# Altium PCB Bender_main.PcbDoc (part 2 of 2)
Units mm, origin at the board's own origin, x right, y up, seen from the top; angles counter-clockwise.
Board outline 153 x 119 mm, 2 copper layers (Top Layer, Bottom Layer); 318 components, 305 nets, 1119 pads, 323 vias.
Unrouted connection lines stored in the file: 2.
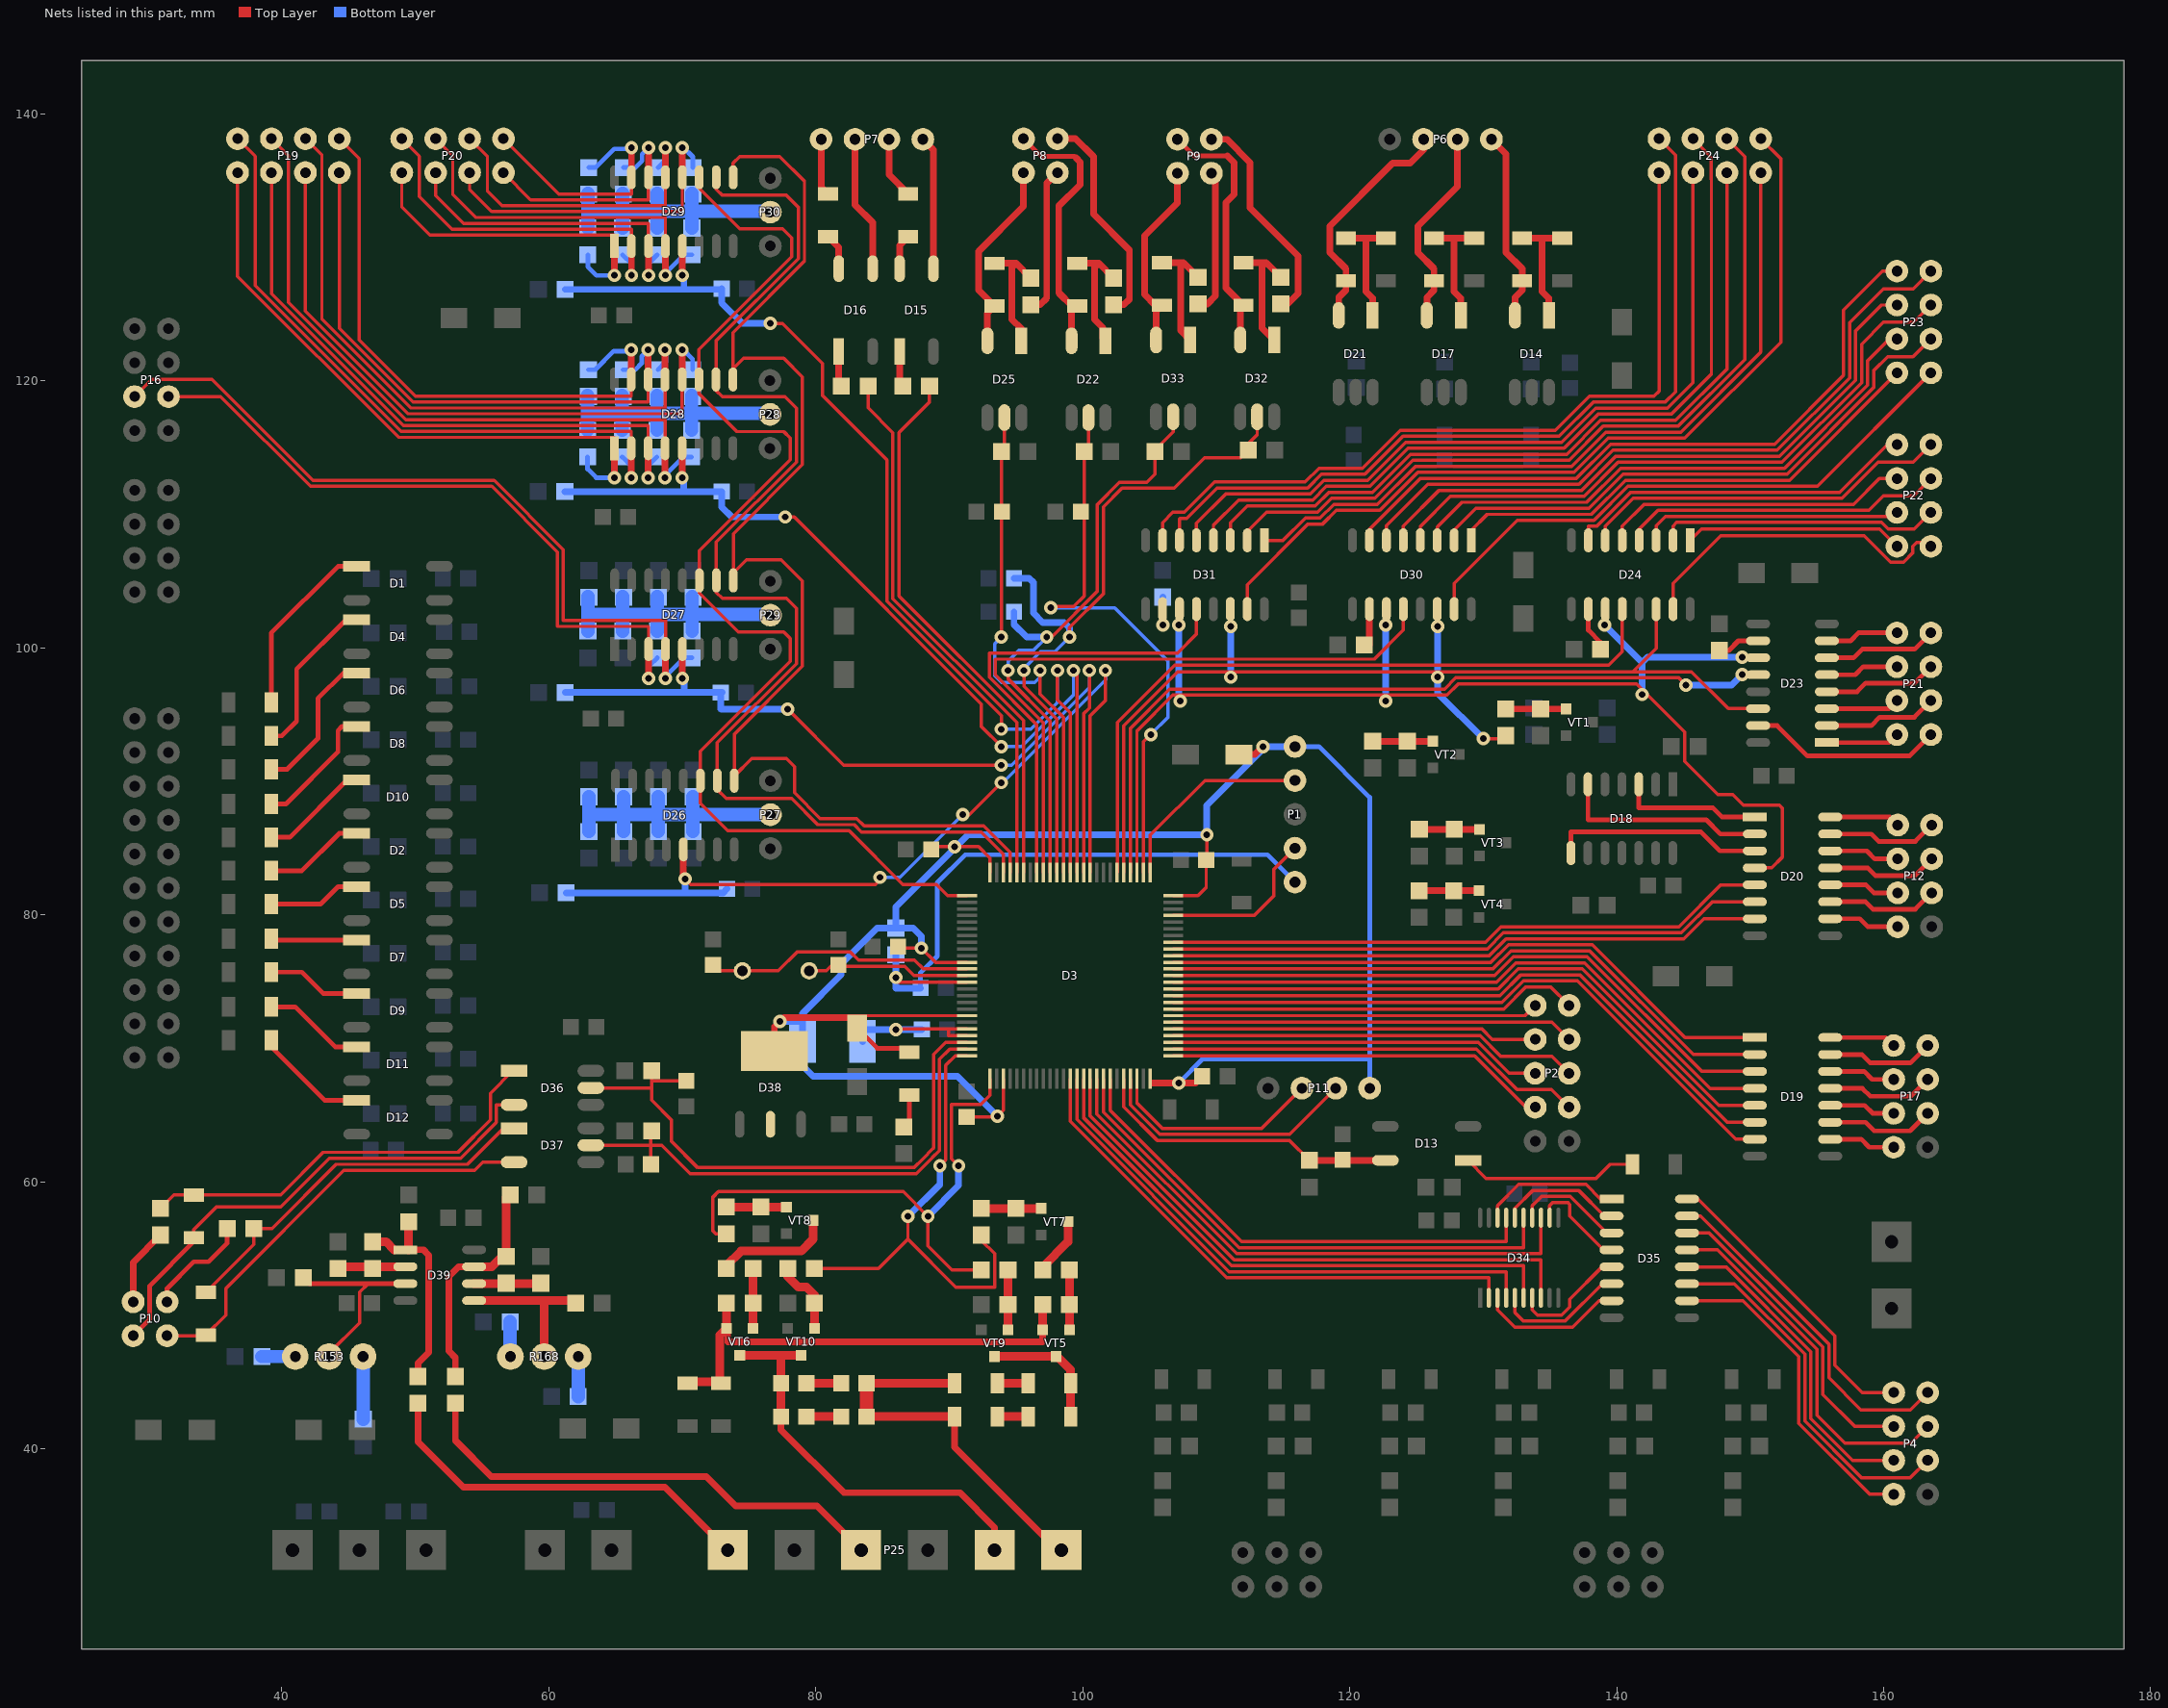
[diagram p2: the nets of this part, all layers, seen from the top]

## Via types
v1: diameter 1, hole 0.5, Top Layer to Bottom Layer, 323 vias

## Nets (pads, with @x,y where several pads share a name; then routed paths per layer and width w, separated by ;. In a path a pad name is that pad's centre, name@x,y a point inside that pad or via, vN(x,y) a via of type N, cw(c..) or ccw(c..) an arc to the next point about the centre after c; other vN are vias at no path point) (continued)
M_IN_15: D27.3 P16.6 R103.1 | length 52.1
  Top Layer w0.24: P16.6@31.5,118.82 35.425,118.82 42.145,112.1 55.723,112.1 60.645,107.178 60.645,101.6 67.47,101.6 D27.3@67.47,99.9
  Top Layer w0.5: v1(67.47,97.7) D27.3@67.47,99.9
  Bottom Layer w0.35: v1@67.53,97.7 67.53,98.65 R103.1@68.13,99.25
M_IN_16: D27.4 P16.5 R104.1 | length 57.9
  Top Layer w0.24: P16.5@28.96,118.82 30.24,120.1 34.767,120.1 42.327,112.54 55.905,112.54 61.085,107.36 61.085,102.04 68.74,102.04 D27.4@68.74,99.9
  Top Layer w0.5: v1(68.74,97.7) D27.4@68.74,99.9
  Bottom Layer w0.35: v1@68.83,97.7 68.83,97.95 70.13,99.25 R104.1@70.73,99.25
M_IN_17: D28.15 P19.1 R105.1 | length 45
  Top Layer w0.24: P19.1@44.3,138.14 45.8,136.64 45.8,123.056 50.006,118.85 66.17,118.85 D28.15@66.17,120.1
  Top Layer w0.5: D28.15@66.17,120.1 v1(66.17,122.33)
  Bottom Layer w0.35: R105.1@62.97,120.83 63.47,120.83 64.87,122.23 v1@66.07,122.23
M_IN_18: D28.14 P19.2 R106.1 | length 43.8
  Top Layer w0.24: P19.2@44.3,135.6 44.3,123.934 49.824,118.41 67.44,118.41 D28.14@67.44,120.1
  Top Layer w0.5: D28.14@67.44,120.1 v1(67.44,122.33)
  Bottom Layer w0.35: R106.1@65.57,120.83 66.47,120.83 66.97,121.33 66.97,121.83 v1@67.47,122.33
M_IN_19: D28.13 P19.3 R107.1 | length 48.6
  Top Layer w0.24: P19.3@41.76,138.14 43,136.9 43,124.611 49.641,117.97 68.71,117.97 D28.13@68.71,120.1
  Top Layer w0.5: D28.13@68.71,120.1 v1(68.71,122.33)
  Bottom Layer w0.35: R107.1@68.17,120.83 68.77,121.43 v1@68.77,122.33
M_IN_20: D28.12 P19.4 R127.1 | length 48.4
  Top Layer w0.24: P19.4@41.76,135.6 41.76,125.229 49.459,117.53 69.98,117.53 D28.12@69.98,120.1
  Top Layer w0.5: D28.12@69.98,120.1 v1(69.98,122.33)
  Bottom Layer w0.35: v1@70.07,122.33 70.77,121.63 R127.1@70.77,120.83
M_IN_21: D28.1 P19.8 R128.1 | length 47.2
  Top Layer w0.24: P19.8@36.68,135.6 36.68,127.82 48.73,115.77 64.9,115.77 D28.1@64.9,114.95
  Top Layer w0.5: v1(64.9,112.75) D28.1@64.9,114.95
  Bottom Layer w0.35: R128.1@62.9,114.3 62.9,113.4 63.55,112.75 v1(64.9,112.75)
M_IN_22: D28.2 P19.7 R129.1 | length 49.6
  Top Layer w0.24: P19.7@36.68,138.14 38,136.82 38,127.122 48.912,116.21 66.17,116.21 D28.2@66.17,114.95
  Top Layer w0.5: v1(66.17,112.75) D28.2@66.17,114.95
  Bottom Layer w0.35: R129.1@65.5,114.3 66.2,113.6 v1@66.2,112.75
M_IN_23: D28.3 P19.6 R130.1 | length 47.1
  Top Layer w0.24: P19.6@39.22,135.6 39.22,126.525 49.095,116.65 67.44,116.65 D28.3@67.44,114.95
  Top Layer w0.5: v1(67.44,112.75) D28.3@67.44,114.95
  Bottom Layer w0.35: v1@67.5,112.75 67.5,113.7 R130.1@68.1,114.3
M_IN_24: D28.4 P19.5 R131.1 | length 51.7
  Top Layer w0.24: P19.5@39.22,138.14 40.5,136.86 40.5,125.867 49.277,117.09 68.71,117.09 D28.4@68.71,114.95
  Top Layer w0.5: v1(68.71,112.75) D28.4@68.71,114.95
  Bottom Layer w0.35: v1@68.8,112.75 68.8,113 70.1,114.3 R131.1@70.7,114.3
M_IN_25: D29.15 P20.1 R132.1 | length 18.5
  Top Layer w0.24: P20.1@56.6,138.14 60.74,134 66.19,134 D29.15@66.19,135.25
  Top Layer w0.5: D29.15@66.19,135.25 v1(66.19,137.48)
  Bottom Layer w0.35: R132.1@62.99,135.98 63.49,135.98 64.89,137.38 v1@66.09,137.38
M_IN_26: D29.14 P20.2 R133.1 | length 18.4
  Top Layer w0.24: P20.2@56.6,135.6 58.64,133.56 67.46,133.56 D29.14@67.46,135.25
  Top Layer w0.5: D29.14@67.46,135.25 v1(67.46,137.48)
  Bottom Layer w0.35: R133.1@65.59,135.98 66.49,135.98 66.99,136.48 66.99,136.98 v1@67.49,137.48
M_IN_27: D29.13 P20.3 R134.1 | length 24.4
  Top Layer w0.24: P20.3@54.06,138.14 55.4,136.8 55.4,134.2 56.48,133.12 68.73,133.12 D29.13@68.73,135.25
  Top Layer w0.5: D29.13@68.73,135.25 v1(68.73,137.48)
  Bottom Layer w0.35: R134.1@68.19,135.98 68.79,136.58 v1@68.79,137.48
M_IN_28: D29.12 P20.4 R135.1 | length 24.5
  Top Layer w0.24: P20.4@54.06,135.6 54.06,134.34 55.72,132.68 70,132.68 D29.12@70,135.25
  Top Layer w0.5: D29.12@70,135.25 v1(70,137.48)
  Bottom Layer w0.35: v1@70.09,137.48 70.79,136.78 R135.1@70.79,135.98
M_IN_29: D29.1 P20.8 R136.1 | length 25.6
  Top Layer w0.24: P20.8@48.98,135.6 48.98,133.02 51.08,130.92 64.92,130.92 D29.1@64.92,130.1
  Top Layer w0.5: v1(64.92,127.9) D29.1@64.92,130.1
  Bottom Layer w0.35: R136.1@62.92,129.45 62.92,128.55 63.57,127.9 v1(64.92,127.9)
M_IN_30: D29.2 P20.7 R137.1 | length 27.1
  Top Layer w0.24: P20.7@48.98,138.14 50.3,136.82 50.3,133.8 52.74,131.36 66.19,131.36 D29.2@66.19,130.1
  Top Layer w0.5: v1(66.19,127.9) D29.2@66.19,130.1
  Bottom Layer w0.35: R137.1@65.52,129.45 66.22,128.75 v1@66.22,127.9
M_IN_31: D29.3 P20.6 R138.1 | length 24.2
  Top Layer w0.24: P20.6@51.52,135.6 51.52,133.88 53.6,131.8 67.46,131.8 D29.3@67.46,130.1
  Top Layer w0.5: v1(67.46,127.9) D29.3@67.46,130.1
  Bottom Layer w0.35: v1@67.52,127.9 67.52,128.85 R138.1@68.12,129.45
M_IN_32: D29.4 P20.5 R139.1 | length 28.4
  Top Layer w0.24: P20.5@51.52,138.14 52.8,136.86 52.8,134 54.56,132.24 68.73,132.24 D29.4@68.73,130.1
  Top Layer w0.5: v1(68.73,127.9) D29.4@68.73,130.1
  Bottom Layer w0.35: v1@68.82,127.9 68.82,128.15 70.12,129.45 R139.1@70.72,129.45
M_S0: D3.1 D26.11 D27.11 D28.11 D29.11 | length 92.7
  Top Layer w0.25: D29.11@71.27,135.25 71.27,134.43 74.3,131.4 77.5,131.4 78.2,130.7 78.2,129.3 71.25,122.35 D28.11@71.25,120.1 71.25,119.05 74.1,116.2 77.6,116.2 78.1,115.7 78.1,114.1 71.28,107.28 D27.11@71.28,105.05 71.28,104.12 74.2,101.2 77.6,101.2 78.1,100.7 78.1,99 71.35,92.25 D26.11@71.35,90.04 71.35,88.35 73.4,86.3 82.5,86.3 86.532,82.268 89.032,82.268 89.862,81.438 D3.1@91.335,81.438
M_S1: D3.98 D26.10 D27.10 D28.10 D29.10 | length 93.2
  Top Layer w0.25: D29.10@72.54,134.36 73,133.9 77.8,133.9 78.7,133 78.7,129.164 72.52,122.984 D28.10@72.52,120.1 72.52,119.28 73,118.8 77.7,118.8 78.55,117.95 78.55,113.914 72.55,107.914 D27.10@72.55,105.05 72.55,104.15 73,103.7 77.8,103.7 78.55,102.95 78.55,98.814 72.62,92.884 D26.10@72.62,90.04 72.62,89.38 73.3,88.7 78.2,88.7 80.15,86.75 82.886,86.75 83.436,86.2 92.4,86.2 94.06,84.54 D3.98@94.06,83.163
M_S2: D3.97 D26.9 D27.9 D28.9 D29.9 | length 97.3
  Top Layer w0.25: D29.9@73.81,135.25 73.81,136.31 74.3,136.8 77.3,136.8 79.15,134.95 79.15,128.977 73.79,123.617 73.79,120.89 74.6,121.7 77.6,121.7 79,120.3 79,113.727 73.82,108.547 D27.9@73.82,105.62 ; D27.9@73.82,105.05 D27.9@73.82,105.62 ; D26.9@73.89,90.04 D26.9@73.89,90.39 ; D3.97@94.56,83.163 94.56,84.676 92.586,86.65 83.623,86.65 83.073,87.2 80.336,87.2 78.4,89.136 78.4,91.1 77.8,91.7 75.2,91.7 D26.9@73.89,90.39 ; D27.9@73.82,105.62 74.8,106.6 77.4,106.6 79,105 79,98.627 73.89,93.517 D26.9@73.89,90.39
M_Y1: C17.1 D3.85 D26.5 R70.1 | length 69.8
  Top Layer w0.25: v1(70.2,82.69) 70.622,82.268 84.468,82.268 v1@84.8,82.6 ; v1(91,87.5) 91.5,87.5 v1(93.9,89.9) ; D3.85@100.56,83.163 100.56,94.906 101.7,96.046 v1(101.7,98.3)
  Top Layer w0.5: D26.5@70.08,84.89 70.08,82.81 v1(70.2,82.69)
  Bottom Layer w0.25: v1(84.8,82.8) 86.3,82.8 v1(91,87.5) ; v1(93.9,89.9) 94.009,89.9 101.736,97.627 101.736,98.264 v1(101.7,98.3)
  Bottom Layer w0.5: R70.1@61.3,81.64 73.05,81.64 C17.1@73.35,81.94 ; 70.2,81.64 v1(70.2,82.69)
M_Y2: C18.1 D3.86 D27.5 R71.1 | length 64.6
  Top Layer w0.25: v1(77.9,95.4) 82.1,91.2 v1(93.9,91.2) ; D3.86@100.06,83.163 100.06,95.06 100.5,95.5 v1(100.5,98.3)
  Top Layer w0.5: v1(70.01,97.7) D27.5@70.01,99.9
  Bottom Layer w0.25: v1(93.9,91.2) 94.673,91.2 100.5,97.027 v1(100.5,98.3)
  Bottom Layer w0.5: R71.1@61.23,96.65 C18.1@72.98,96.65 ; 70.13,96.65 v1@70.13,97.7 ; C18.1@72.88,96.65 72.88,95.42 72.9,95.4 v1(77.9,95.4)
M_Y3: C19.1 D3.87 D28.5 R72.1 | length 69.6
  Top Layer w0.25: v1(77.7,109.8) 78.391,109.8 92.4,95.791 92.4,94.1 v1(93.9,92.6) ; v1(99.3,98.3) 99.56,98.04 D3.87@99.56,83.163
  Top Layer w0.5: v1(69.98,112.75) D28.5@69.98,114.95
  Bottom Layer w0.25: v1(93.9,92.6) 95.436,92.6 99.3,96.464 v1(99.3,98.3)
  Bottom Layer w0.5: R72.1@61.2,111.7 C19.1@72.95,111.7 72.95,110.55 73,110.5 73.7,109.8 v1(77.7,109.8) ; 70.1,111.7 v1@70.1,112.75
M_Y4: C20.1 D3.88 D29.5 R73.1 | length 81.4
  Top Layer w0.25: v1(76.6,124.3) 77.5,124.3 80.5,121.3 80.5,118.9 85.328,114.072 85.328,103.499 93.9,94.927 v1(93.9,93.9) ; v1(98.1,98.3) 98.1,96.1 99.06,95.14 D3.88@99.06,83.163
  Top Layer w0.5: v1(70,127.9) D29.5@70,130.1
  Bottom Layer w0.25: v1(93.9,93.9) 96.1,93.9 98.1,95.9 v1(98.1,98.3)
  Bottom Layer w0.5: R73.1@61.22,126.85 C20.1@72.95,126.85 ; 70.12,126.85 v1@70.12,127.9 ; C20.1@72.95,126.9 C20.1@72.95,126.85 ; v1(76.6,124.3) 74.5,124.3 73,125.8 72.95,125.85 C20.1@72.95,126.85
NetC1_1: C1.1 D3.21 D3.22 L1.2 | length 12.6
  Top Layer w0.25: v1(86,71.4) 86.038,71.438 89.9,71.438 ; D3.22@91.335,70.938 89.962,70.938 89.962,71.376 89.9,71.438 ; D3.21@91.335,71.438 89.9,71.438
  Bottom Layer w0.5: L1.2@83.5,70.5 83.5,71.4 v1(86,71.4) C1.1@87.95,71.4
NetC13_1: C13.1 C14.2 | length 2.6
  Top Layer w0.65: C14.2@79.3,44.9 C13.1@81.9,44.9
NetC15_1: C15.1 C16.2 | length 2.6
  Top Layer w0.65: C16.2@79.3,42.4 C15.1@81.9,42.4
NetD1_1: D1.1 R1.2 | length 13.7
  Top Layer w0.35: R1.2@39.2,95.9 39.2,101.1 44.2,106.1 D1.1@45.6,106.1
NetD2_1: D2.1 R2.2 | length 7.6
  Top Layer w0.35: R2.2@39.2,83.3 41.5,83.3 44.3,86.1 D2.1@45.6,86.1
NetD4_1: D4.1 R4.2 | length 12.3
  Top Layer w0.35: R4.2@39.2,93.4 40,93.4 41.1,94.5 41.1,98.4 44.8,102.1 D4.1@45.6,102.1
NetD5_1: D5.1 R5.2 | length 6.9
  Top Layer w0.35: R5.2@39.2,80.8 42.9,80.8 44.2,82.1 D5.1@45.6,82.1
NetD6_1: D6.1 R7.2 | length 11.1
  Top Layer w0.35: R7.2@39.2,90.9 40.4,90.9 42.7,93.2 42.7,96.2 44.6,98.1 D6.1@45.6,98.1
NetD7_1: D7.1 R8.2 | length 6.4
  Top Layer w0.35: R8.2@39.2,78.2 39.3,78.1 D7.1@45.6,78.1
NetD8_1: D8.1 R9.2 | length 9.7
  Top Layer w0.35: R9.2@39.2,88.3 40.3,88.3 44.2,92.2 44.2,93.8 44.5,94.1 D8.1@45.6,94.1
NetD9_1: D9.1 R10.2 | length 7.1
  Top Layer w0.35: R10.2@39.2,75.7 41.5,75.7 43.1,74.1 D9.1@45.6,74.1
NetD10_1: D10.1 R13.2 | length 8.2
  Top Layer w0.35: R13.2@39.2,85.8 40.6,85.8 44.9,90.1 D10.1@45.6,90.1
NetD11_1: D11.1 R14.2 | length 7.6
  Top Layer w0.35: R14.2@39.2,73.1 41,73.1 44,70.1 D11.1@45.6,70.1
NetD12_1: D12.1 R17.2 | length 8.6
  Top Layer w0.35: R17.2@39.2,70.6 39.2,70.1 43.2,66.1 D12.1@45.6,66.1
NetD13_1: D13.1 R18.2 | length 13.3
  Top Layer w0.25: D13.1@128.875,61.6 130.225,60.25 138.45,60.25 139.5,61.3 R18.2@141.2,61.3
NetD14_1: D14.1 R19.2 VD1.2 | length 9
  Top Layer w0.5: VD1.2@132.92,130.7 134.42,130.7 ; D14.1@134.92,124.9 134.92,126.2 134.42,126.7 134.42,130.7 ; R19.2@135.92,130.7 134.42,130.7
NetD15_1: D15.1 R21.1 | length 2.7
  Top Layer w0.5: D15.1@86.275,122.201 86.275,119.845 R21.1@86.52,119.6
NetD15_4: D15.4 R20.2 | length 2.7
  Top Layer w0.5: D15.4@86.275,128.401 86.275,130.155 R20.2@86.92,130.8
NetD16_1: D16.1 R27.1 | length 2.7
  Top Layer w0.5: D16.1@81.72,122.2 81.72,119.8 R27.1@81.92,119.6
NetD16_4: D16.4 R26.2 | length 2.7
  Top Layer w0.5: R26.2@80.92,130.8 81.72,130 D16.4@81.72,128.4
NetD17_1: D17.1 R28.2 VD2.2 | length 9
  Top Layer w0.5: VD2.2@126.32,130.7 127.82,130.7 ; D17.1@128.32,124.9 128.32,126.2 127.82,126.7 127.82,130.7 ; R28.2@129.32,130.7 127.82,130.7
NetD21_1: D21.1 R29.2 VD3.2 | length 9
  Top Layer w0.5: VD3.2@119.72,130.7 121.22,130.7 ; D21.1@121.72,124.9 121.72,126.2 121.22,126.7 121.22,130.7 ; R29.2@122.72,130.7 121.22,130.7
NetD22_1: D22.1 R30.2 VD4.2 | length 9.4
  Top Layer w0.5: VD4.2@99.6,128.8 101.2,128.8 ; D22.1@101.7,123 101.5,123.2 101.5,124 100.9,124.6 100.9,128.5 101.2,128.8 ; R30.2@102.3,127.7 101.2,128.8
NetD23_10: D23.10 R31.1 | length 3.2
  Top Layer w0.35: R31.1@147.7,99.8 148.4,99.8 149.12,100.52 D23.10@150.6,100.52
NetD24_10: D24.10 R32.1 | length 3.4
  Top Layer w0.35: D24.10@137.88,102.9 137.88,101.32 138.8,100.4 R32.1@138.8,99.9
NetD25_1: D25.1 R33.2 VD5.2 | length 9.4
  Top Layer w0.5: VD5.2@93.4,128.8 95,128.8 ; D25.1@95.4,123 95.4,123.9 94.7,124.6 94.7,128.5 95,128.8 ; R33.2@96.1,127.7 95,128.8
NetD30_10: D30.10 R34.1 | length 3.1
  Top Layer w0.5: R34.1@121.1,100.2 121.48,100.2 D30.10@121.48,102.9
NetD31_10: D31.10 R35.1 | length 2.1
  Bottom Layer w0.5: v1(106,101.7) R35.1@106,103.8
NetD32_1: D32.1 R36.2 VD6.2 | length 9.6
  Top Layer w0.5: VD6.2@112.04,128.86 113.74,128.86 ; D32.1@114.34,123.06 113.44,123.96 113.44,128.56 113.74,128.86 ; R36.2@114.84,127.76 113.74,128.86
NetD33_1: D33.1 R37.2 VD7.2 | length 9.3
  Top Layer w0.5: VD7.2@105.94,128.86 107.54,128.86 ; D33.1@108.04,123.06 107.34,123.76 107.34,128.66 107.54,128.86 ; R37.2@108.64,127.76 107.54,128.86
NetD34_3: D34.3 D35.7 | length 10.8
  Top Layer w0.25: D34.3@131.075,51.3 131.075,50.4 132.375,49.1 136.7,49.1 138.68,51.08 D35.7@139.625,51.08
NetD34_5: D34.5 D35.6 | length 9.8
  Top Layer w0.25: D34.5@132.375,51.3 132.375,50.2 133.025,49.55 136.125,49.55 138.925,52.35 D35.6@139.625,52.35
NetD34_7: D34.7 D35.5 | length 8.9
  Top Layer w0.25: D34.7@133.675,51.3 133.675,50.4 134.075,50 135.875,50 136.475,50.6 136.475,51.175 138.92,53.62 D35.5@139.625,53.62
NetD34_12: D34.12 D35.4 | length 7.6
  Top Layer w0.25: D34.12@134.975,57.3 134.975,58.2 135.225,58.45 136.325,58.45 136.475,58.3 136.475,57.425 139.01,54.89 D35.4@139.625,54.89
NetD34_14: D34.14 D35.3 | length 8.3
  Top Layer w0.25: D34.14@133.675,57.3 133.675,58.2 134.375,58.9 136.511,58.9 139.251,56.16 D35.3@139.625,56.16
NetD34_16: D34.16 D35.2 | length 9.3
  Top Layer w0.25: D34.16@132.375,57.3 132.375,58 133.725,59.35 137.15,59.35 139.07,57.43 D35.2@139.625,57.43
NetD34_18: D34.18 D35.1 | length 10.6
  Top Layer w0.25: D34.18@131.075,57.3 131.075,58.2 132.675,59.8 137.7,59.8 138.8,58.7 D35.1@139.625,58.7
NetD36_1: D36.1 R44.2 VD11.2 | length 31.9
  Top Layer w0.25: R44.2@30.9,58 31.9,59 VD11.2@33.4,59 39.9,59 43.1,62.2 53.2,62.2 55.625,64.625 55.625,66.625 57.3,68.3 D36.1@57.4,68.3
NetD37_1: D37.1 R51.2 VD15.2 | length 28.9
  Top Layer w0.25: VD15.2@34.3,51.7 37.9,55.3 R51.2@37.9,56.5 39.264,56.5 44.064,61.3 53.9,61.3 56.6,64 D37.1@57.4,64
NetD39_1: D39.1 R157.1 R159.2 R162.2 | length 16.1
  Top Layer w0.35: D39.1@48.4,54.9 D39.1@49.25,54.9
  Top Layer w0.5: D39.1@49.25,54.9 49.5,54.9 50.6,54.9 51,54.5 51,47.2 50.2,46.4 R159.2@50.2,45.4
  Top Layer w0.65: R157.1@46.8,55.5 47.8,55.5 D39.1@48.4,54.9 ; D39.1@49.5,54.9 R162.2@49.5,57
NetD39_2: D39.2 R157.2 R158.1 | length 5.1
  Top Layer w0.35: R158.1@44.2,53.5 R158.1@44.33,53.63
  Top Layer w0.65: R158.1@44.33,53.63 D39.2@49.25,53.63
NetD39_3: D39.3 R153.3 R156.1 | length 14.5
  Top Layer w0.25: R153.3@43.54,46.9 43.54,47.14 45.825,49.425 45.825,51.725 46.46,52.36
  Top Layer w0.35: R156.1@41.6,52.8 42.04,52.36 46.46,52.36 ; 46.475,52.36 D39.3@49.25,52.36
NetD39_5: D39.5 R164.1 R168.3 | length 11.9
  Top Layer w0.35: R164.1@61.81,51.09 R164.1@62,50.9
  Top Layer w0.65: D39.5@54.4,51.09 59.64,51.09 ; R168.3@59.64,46.9 59.64,51.09 ; R164.1@61.81,51.09 59.64,51.09
NetD39_6: D39.6 R160.1 R165.2 | length 5
  Top Layer w0.35: R160.1@59.36,52.36 R160.1@59.4,52.4
  Top Layer w0.65: D39.6@54.4,52.36 R160.1@59.36,52.36
NetD39_7: D39.7 R161.2 R163.2 R165.1 | length 17.3
  Top Layer w0.35: R165.1@56.5,54.4 R165.1@56.8,54.4 ; R163.2@56.8,58.8 R163.2@57,59
  Top Layer w0.5: R161.2@53,45.4 53,46.8 52.5,47.3 52.5,52.9 53.23,53.63 D39.7@54.4,53.63
  Top Layer w0.65: D39.7@54.4,53.63 55.73,53.63 R165.1@56.5,54.4 ; R165.1@56.8,54.4 R163.2@56.8,58.8
NetP27_2: P27.2 R89.2 R90.2 R91.2 R92.2 R93.2 R94.2 R95.2 R96.2 | length 24
  Bottom Layer w1: R93.2@63,86.24 63,87.5 ; R89.2@63,88.84 63,87.5 ; R94.2@65.6,86.24 65.6,87.5 ; R90.2@65.6,88.84 65.6,87.5 ; R95.2@68.2,86.24 68.2,87.5 ; R91.2@68.2,88.84 68.2,87.5 ; R96.2@70.8,86.24 70.8,87.5 ; R92.2@70.8,88.84 70.8,87.5 ; P27.2@76.6,87.5 70.8,87.5 ; 63,87.5 65.6,87.5 ; 65.6,87.5 68.2,87.5 ; 68.2,87.5 70.8,87.5
NetP28_2: P28.2 R105.2 R106.2 R107.2 R127.2 R128.2 R129.2 R130.2 R131.2 | length 24
  Bottom Layer w1: R128.2@62.9,116.3 62.9,117.56 ; R105.2@62.9,118.9 62.9,117.56 ; R129.2@65.5,116.3 65.5,117.56 ; R106.2@65.5,118.9 65.5,117.56 ; R130.2@68.1,116.3 68.1,117.56 ; R107.2@68.1,118.9 68.1,117.56 ; R131.2@70.7,116.3 70.7,117.56 ; R127.2@70.7,118.9 70.7,117.56 ; P28.2@76.5,117.56 70.7,117.56 ; 62.9,117.56 65.5,117.56 ; 65.5,117.56 68.1,117.56 ; 68.1,117.56 70.7,117.56
NetP29_2: P29.2 R97.2 R98.2 R99.2 R100.2 R101.2 R102.2 R103.2 R104.2 | length 24
  Bottom Layer w1: R101.2@62.93,101.25 62.93,102.51 ; R97.2@62.93,103.85 62.93,102.51 ; R102.2@65.53,101.25 65.53,102.51 ; R98.2@65.53,103.85 65.53,102.51 ; R103.2@68.13,101.25 68.13,102.51 ; R99.2@68.13,103.85 68.13,102.51 ; R104.2@70.73,101.25 70.73,102.51 ; R100.2@70.73,103.85 70.73,102.51 ; P29.2@76.53,102.51 70.73,102.51 ; 62.93,102.51 65.53,102.51 ; 65.53,102.51 68.13,102.51 ; 68.13,102.51 70.73,102.51
NetP30_2: P30.2 R132.2 R133.2 R134.2 R135.2 R136.2 R137.2 R138.2 R139.2 | length 24
  Bottom Layer w1: R136.2@62.92,131.45 62.92,132.71 ; R132.2@62.92,134.05 62.92,132.71 ; R137.2@65.52,131.45 65.52,132.71 ; R133.2@65.52,134.05 65.52,132.71 ; R138.2@68.12,131.45 68.12,132.71 ; R134.2@68.12,134.05 68.12,132.71 ; R139.2@70.72,131.45 70.72,132.71 ; R135.2@70.72,134.05 70.72,132.71 ; P30.2@76.52,132.71 70.72,132.71 ; 62.92,132.71 65.52,132.71 ; 65.52,132.71 68.12,132.71 ; 68.12,132.71 70.72,132.71
NetR6_2: R6.2 VL1.2 | length 2.6
  Top Layer w0.35: R6.2@86.6,64.1 87,64.5 VL1.2@87,66.5
NetR11_2: R11.2 R15.2 VT1.1 | length 4.5
  Top Layer w0.5: R11.2@131.7,95.42 R15.2@134.3,95.42 VT1.1@136.2,95.42
NetR12_2: R12.2 R16.2 VT2.1 | length 4.5
  Top Layer w0.5: R12.2@121.72,93 R16.2@124.32,93 VT2.1@126.22,93
NetR22_2: R22.2 R24.2 VT3.1 | length 4.5
  Top Layer w0.5: R22.2@125.22,86.4 R24.2@127.82,86.4 VT3.1@129.72,86.4
NetR23_2: R23.2 R25.2 VT4.1 | length 4.5
  Top Layer w0.5: R23.2@125.2,81.8 VT4.1@129.7,81.8
NetR52_1: R52.1 R53.1 R54.2 R55.2 VT5.2 VT6.2 | length 36
  Top Layer w0.5: VT6.2@73.3,49 73.4,48.9 73.4,48 97,48 VT5.2@97,48.9
  Top Layer w0.65: R53.1@70.3,45 72.8,45 72.8,48.5 VT6.2@73.3,49 R55.2@73.3,50.9 ; VT5.2@97,48.9 R54.2@97,50.8
NetR54_1: R54.1 R56.1 VT5.1 | length 4.5
  Top Layer w0.65: VT5.1@99,48.9 R54.1@99,50.8 R56.1@99,53.4
NetR55_1: R55.1 R57.2 VT6.1 | length 4.5
  Top Layer w0.65: VT6.1@75.3,49 R55.1@75.3,50.9 R57.2@75.3,53.5
NetR56_2: R56.2 VT7.3 | length 4.2
  Top Layer w0.65: R56.2@97,53.6 98.9,55.5 VT7.3@98.9,57
NetR57_1: R57.1 VT8.3 | length 8.9
  Top Layer w0.65: R57.1@73.3,53.5 73.3,53.7 74.4,54.8 78.9,54.8 79.8,55.7 VT8.3@79.8,57.1
NetR58_2: R58.2 R59.2 VT8.1 | length 4.5
  Top Layer w0.65: R59.2@73.3,58.1 R58.2@75.9,58.1 VT8.1@77.8,58.1
NetR60_2: R60.2 R61.2 VT7.1 | length 4.5
  Top Layer w0.65: R60.2@92.4,58 R61.2@95,58 VT7.1@96.9,58
NetR62_1: R62.1 R65.2 VT9.1 | length 4.5
  Top Layer w0.65: VT9.1@94.4,48.9 R62.1@94.4,53.4
NetR63_2: R63.2 R64.2 VT10.1 | length 5.7
  Top Layer w0.65: R64.2@77.9,53.5 77.9,52.9 78.7,52.1 79.3,52.1 79.9,51.5 R63.2@79.9,50.9 VT10.1@79.9,49
NetR66_1: R66.1 R67.2 | length 2.3
  Top Layer w0.65: R67.2@93.6,42.4 R66.1@95.9,42.4
NetR66_2: R66.2 R68.2 VT5.3 VT9.3 | length 9.6
  Top Layer w0.65: VT9.3@93.4,46.9 VT5.3@98,46.9 98.1,46.9 99.1,45.9 R68.2@99.1,44.9 R66.2@99.1,42.4
NetR68_1: R68.1 R69.2 | length 2.3
  Top Layer w0.65: R69.2@93.6,44.9 R68.1@95.9,44.9
NetR153_1: R153.1 R155.2 | length 2.5
  Bottom Layer w1: R155.2@38.5,46.9 R153.1@41,46.9
NetR153_2: R153.2 R154.1 | length 4.7
  Bottom Layer w1: R153.2@46.08,46.9 46.1,46.88 R154.1@46.1,42.2
NetR166_1: R166.1 R168.1 | length 3
  Bottom Layer w1: R166.1@62.2,43.9 R168.1@62.2,46.9
NetR167_2: R167.2 R168.2 | length 2.6
  Bottom Layer w1: R167.2@57.1,49.5 57.1,46.92 R168.2@57.12,46.9
NRST: C4.2 D3.14 P1.5 R3.2 | length 47
  Top Layer w0.25: v1(86,75.3) 86,74.976 86.038,74.938 D3.14@91.335,74.938
  Bottom Layer w0.35: C4.2@87.85,74.5 87.85,75.65 89.1,76.9 89.1,82.4 91.2,84.5 113.84,84.5 P1.5@115.9,82.44
  Bottom Layer w0.5: R3.2@86,77 v1(86,75.3) 86,74.5 C4.2@87.85,74.5
O_1: D23.15 P21.1 | length 14.5
  Top Layer w0.35: D23.15@150.6,94.17 152.03,94.17 154.3,91.9 161.94,91.9 P21.1@163.54,93.5
O_2: D23.1 P21.2 | length 5.5
  Top Layer w0.35: D23.1@155.75,92.9 160.4,92.9 P21.2@161,93.5
O_3: D23.2 P21.3 | length 8.6
  Top Layer w0.35: D23.2@155.75,94.17 159.07,94.17 159.7,94.8 162.3,94.8 P21.3@163.54,96.04
O_4: D23.3 P21.4 | length 5.5
  Top Layer w0.35: D23.3@155.75,95.44 160.4,95.44 P21.4@161,96.04
O_5: D23.4 P21.5 | length 8.6
  Top Layer w0.35: D23.4@155.75,96.71 158.01,96.71 158.655,97.355 162.315,97.355 P21.5@163.54,98.58
O_6: D23.5 P21.6 | length 5.5
  Top Layer w0.35: D23.5@155.75,97.98 157.88,97.98 158.48,98.58 P21.6@161,98.58
O_7: D23.6 P21.7 | length 8.6
  Top Layer w0.35: D23.6@155.75,99.25 157.75,99.25 158.395,99.895 162.315,99.895 P21.7@163.54,101.12
O_8: D23.7 P21.8 | length 5.5
  Top Layer w0.35: D23.7@155.75,100.52 157.52,100.52 158.12,101.12 P21.8@161,101.12
O_9: D24.15 P22.1 | length 24.6
  Top Layer w0.25: D24.15@144.23,102.9 144.23,104.83 147.8,108.4 158.538,108.4 160.513,106.425 161.487,106.425 162.175,107.113 162.175,107.614 162.461,107.9 163.24,107.9 P22.1@163.54,107.6
O_10: D24.1 P22.2 | length 16.4
  Top Layer w0.25: D24.1@145.5,108.05 146.35,108.9 159.7,108.9 P22.2@161,107.6
O_11: D24.2 P22.3 | length 21.2
  Top Layer w0.25: D24.2@144.23,108.05 144.23,109.13 144.5,109.4 159.836,109.4 160.336,108.9 162.3,108.9 P22.3@163.54,110.14
O_12: D24.3 P22.4 | length 19.6
  Top Layer w0.25: D24.3@142.96,108.05 142.96,109.16 143.65,109.85 160.71,109.85 P22.4@161,110.14
O_13: D24.4 P22.5 | length 24.7
  Top Layer w0.25: D24.4@141.69,108.05 141.69,108.89 143.1,110.3 158.9,110.3 160,111.4 162.26,111.4 P22.5@163.54,112.68 P22.5@163.08,112.68
O_14: D24.5 P22.6 | length 23.1
  Top Layer w0.25: D24.5@140.42,108.05 140.42,109.12 142.05,110.75 157.75,110.75 159.68,112.68 P22.6@161,112.68
O_15: D24.6 P22.7 | length 28
  Top Layer w0.25: D24.6@139.15,108.05 139.15,109.122 141.228,111.2 156.9,111.2 159.6,113.9 162.22,113.9 P22.7@163.54,115.22
O_16: D24.7 P22.8 | length 26.7
  Top Layer w0.25: D24.7@137.88,108.05 137.88,109.1 138.491,109.1 141.041,111.65 156.714,111.65 160.284,115.22 P22.8@161,115.22
O_17: D30.15 P23.1 | length 44.2
  Top Layer w0.25: D30.15@127.83,102.9 127.83,104.83 132.55,109.55 138.305,109.55 140.855,112.1 155.04,112.1 P23.1@163.54,120.6
O_18: D30.1 P23.2 | length 37.5
  Top Layer w0.25: D30.1@129.1,108.05 129.1,108.8 130.3,110 138.118,110 140.668,112.55 152.95,112.55 P23.2@161,120.6
O_19: D30.2 P23.3 | length 43.2
  Top Layer w0.25: D30.2@127.83,108.05 127.83,108.83 129.45,110.45 137.932,110.45 140.482,113 152.764,113 159.25,119.486 159.25,120.754 160.296,121.8 162.2,121.8 P23.3@163.54,123.14
O_20: D30.3 P23.4 | length 42.4
  Top Layer w0.25: D30.3@126.56,108.05 126.56,109.06 128.4,110.9 137.746,110.9 140.296,113.45 152.577,113.45 158.8,119.673 158.8,121.5 160.44,123.14 P23.4@161,123.14
O_21: D30.4 P23.5 | length 47.9
  Top Layer w0.25: D30.4@125.29,108.05 125.29,109.09 127.55,111.35 137.559,111.35 140.109,113.9 152.391,113.9 158.35,119.859 158.35,122.75 160,124.4 162.26,124.4 P23.5@163.54,125.68
O_22: D30.5 P23.6 | length 47.1
  Top Layer w0.25: D30.5@124.02,108.05 124.02,109.12 126.7,111.8 137.373,111.8 139.923,114.35 152.204,114.35 157.9,120.046 157.9,123.736 159.844,125.68 P23.6@161,125.68
O_23: D30.6 P23.7 | length 52.2
  Top Layer w0.25: D30.6@122.75,108.05 122.75,109.15 125.85,112.25 137.186,112.25 139.736,114.8 152.018,114.8 157.45,120.232 157.45,124.35 160,126.9 162.22,126.9 P23.7@163.54,128.22
O_24: D30.7 P23.8 | length 51.2
  Top Layer w0.25: D30.7@121.48,108.05 121.48,108.88 125.3,112.7 137,112.7 139.55,115.25 151.832,115.25 157,120.418 157,125.3 159.92,128.22 P23.8@161,128.22
O_25: D31.15 P24.1 | length 65.2
  Top Layer w0.25: D31.15@112.33,102.9 112.33,104.73 116.875,109.275 117.975,109.275 119,110.3 122.264,110.3 125.114,113.15 136.814,113.15 139.364,115.7 145.1,115.7 152.3,122.9 152.3,136.64 P24.1@150.8,138.14
O_26: D31.1 P24.2 | length 56.5
  Top Layer w0.25: D31.1@113.6,108.05 115.014,108.05 116.689,109.725 117.789,109.725 118.814,110.75 122.077,110.75 124.927,113.6 136.627,113.6 139.177,116.15 144.8,116.15 150.8,122.15 P24.2@150.8,135.6
O_27: D31.2 P24.3 | length 60.4
  Top Layer w0.25: D31.2@112.33,108.05 112.33,108.73 113.775,110.175 117.602,110.175 118.627,111.2 121.891,111.2 124.741,114.05 136.441,114.05 138.991,116.6 144.614,116.6 149.6,121.586 149.6,136.8 P24.3@148.26,138.14
O_28: D31.3 P24.4 | length 58
  Top Layer w0.25: D31.3@111.06,108.05 111.06,109.36 112.325,110.625 117.416,110.625 118.441,111.65 121.704,111.65 124.554,114.5 136.254,114.5 138.804,117.05 144.427,117.05 148.26,120.883 P24.4@148.26,135.6
O_29: D31.4 P24.5 | length 61.3
  Top Layer w0.25: D31.4@109.79,108.05 109.79,109.19 111.675,111.075 117.229,111.075 118.254,112.1 121.518,112.1 124.368,114.95 136.068,114.95 138.618,117.5 144.1,117.5 147.099,120.499 147.099,135.099 147.085,135.113 147.085,136.775 P24.5@145.72,138.14
O_30: D31.5 P24.6 | length 58.6
  Top Layer w0.25: D31.5@108.52,108.05 108.52,109.32 110.725,111.525 117.043,111.525 118.068,112.55 121.332,112.55 124.182,115.4 135.882,115.4 138.432,117.95 143.8,117.95 145.72,119.87 P24.6@145.72,135.6
O_31: D31.6 P24.7 | length 62.2
  Top Layer w0.25: D31.6@107.25,108.05 107.25,109.65 107.3,109.7 107.782,109.7 110.057,111.975 116.857,111.975 117.882,113 121.145,113 123.995,115.85 135.695,115.85 138.245,118.4 143.614,118.4 144.4,119.186 144.4,136.92 P24.7@143.18,138.14
O_32: D31.7 P24.8 | length 59
  Top Layer w0.25: D31.7@105.98,108.05 105.98,109.38 106.75,110.15 107.596,110.15 109.871,112.425 116.67,112.425 117.695,113.45 120.959,113.45 123.809,116.3 135.4,116.3 137.95,118.85 142.8,118.85 143.18,119.23 P24.8@143.18,135.6
O_CP: D3.67 D20.6 | length 45
  Top Layer w0.25: D3.67@106.785,77.438 130.31,77.438 131.522,78.65 144.85,78.65 147.17,80.97 D20.6@150.35,80.97
O_D1: D18.3 D20.1 | length 10.7
  Top Layer w0.35: D18.3@141.66,89.77 141.66,88.02 147.2,88.02 147.9,87.32 D20.1@150.35,87.32
O_D2: D18.6 D20.2 | length 15.6
  Top Layer w0.35: D18.6@137.85,89.77 137.85,87.12 146.7,87.12 147.77,86.05 D20.2@150.35,86.05
O_D3: D18.8 D20.3 | length 16
  Top Layer w0.35: D18.8@136.58,84.62 136.58,86.22 146.3,86.22 147.74,84.78 D20.3@150.35,84.78
O_OE: D3.66 D20.7 | length 44.7
  Top Layer w0.25: D3.66@106.785,76.938 130.447,76.938 131.709,78.2 145.036,78.2 146.536,79.7 D20.7@150.35,79.7
O_STR: D3.68 D20.5 | length 45.3
  Top Layer w0.25: D3.68@106.785,77.938 130.174,77.938 131.336,79.1 144.664,79.1 147.804,82.24 D20.5@150.35,82.24
OT10: P7.2 R20.1 | length 4.7
  Top Layer w0.5: P7.2@85.48,138.1 85.48,135.44 R20.1@86.92,134
OT10_1: D15.3 P7.1 | length 10
  Top Layer w0.5: P7.1@88.02,138.1 88.815,137.305 D15.3@88.815,128.401
OT11: P7.4 R26.1 | length 4.3
  Top Layer w0.5: P7.4@80.4,138.1 80.4,134.52 R26.1@80.92,134
OT11_1: D16.3 P7.3 | length 10.2
  Top Layer w0.5: P7.3@82.94,138.1 82.94,133.18 84.26,131.86 D16.3@84.26,128.4
OUT_2_1: D3.38 D34.2 | length 40.9
  Top Layer w0.25: D3.38@99.06,67.713 99.06,64.522 110.782,52.8 130.425,52.8 D34.2@130.425,51.3
OUT_2_2: D3.39 D34.4 | length 41.9
  Top Layer w0.25: D3.39@99.56,67.713 99.56,64.658 110.968,53.25 131.725,53.25 D34.4@131.725,51.3
OUT_2_3: D3.40 D34.6 | length 42.9
  Top Layer w0.25: D3.40@100.06,67.713 100.06,64.795 111.155,53.7 133.025,53.7 D34.6@133.025,51.3
OUT_2_4: D3.41 D34.8 | length 43.9
  Top Layer w0.25: D3.41@100.56,67.713 100.56,64.931 111.341,54.15 134.325,54.15 D34.8@134.325,51.3
OUT_2_5: D3.42 D34.13 | length 42.9
  Top Layer w0.25: D3.42@101.06,67.713 101.06,65.068 111.528,54.6 134.325,54.6 D34.13@134.325,57.3
OUT_2_6: D3.43 D34.15 | length 40.4
  Top Layer w0.25: D3.43@101.56,67.713 101.56,65.204 111.714,55.05 133.025,55.05 D34.15@133.025,57.3
OUT_2_7: D3.44 D34.17 | length 37.9
  Top Layer w0.25: D3.44@102.06,67.713 102.06,65.34 111.9,55.5 131.725,55.5 D34.17@131.725,57.3
OUT_3_1: D3.55 P2.3 | length 27.4
  Top Layer w0.25: D3.55@106.785,71.438 129.908,71.438 130.686,70.66 P2.3@133.9,70.66
OUT_3_2: D3.56 P2.4 | length 30.2
  Top Layer w0.25: D3.56@106.785,71.938 135.162,71.938 P2.4@136.44,70.66
OUT_3_3: D3.57 P2.1 | length 27.4
  Top Layer w0.25: D3.57@106.785,72.438 133.138,72.438 P2.1@133.9,73.2
OUT_3_4: D3.58 P2.2 | length 30.9
  Top Layer w0.25: D3.58@106.785,72.938 131.538,72.938 133.2,74.6 135.04,74.6 P2.2@136.44,73.2
OUT_3_5: D3.59 D19.7 | length 49.1
  Top Layer w0.25: D3.59@106.785,73.438 131.402,73.438 133.014,75.05 137.05,75.05 148.92,63.18 D19.7@150.35,63.18
OUT_3_6: D3.60 D19.6 | length 48.8
  Top Layer w0.25: D3.60@106.785,73.938 131.265,73.938 132.827,75.5 137.236,75.5 148.286,64.45 D19.6@150.35,64.45
OUT_3_7: D3.61 D19.5 | length 48.4
  Top Layer w0.25: D3.61@106.785,74.438 131.129,74.438 132.641,75.95 137.423,75.95 147.653,65.72 D19.5@150.35,65.72
OUT_4_1: D3.62 D19.4 | length 48.1
  Top Layer w0.25: D3.62@106.785,74.938 130.992,74.938 132.454,76.4 137.609,76.4 147.019,66.99 D19.4@150.35,66.99
OUT_4_4: D3.65 D19.1 | length 47
  Top Layer w0.25: D3.65@106.785,76.438 130.583,76.438 131.895,77.75 138.168,77.75 145.118,70.8 D19.1@150.35,70.8
OUT_X: P25.1 R159.1 | length 29.5
  Top Layer w0.5: R159.1@50.2,43.4 50.2,40.5 53.6,37.1 68.7,37.1 P25.1@73.4,32.4
OUT_Y+: C14.1 C16.1 P25.5 VT6.3 VT10.3 | length 30.9
  Top Layer w0.5: C16.1@77.4,42.4 77.4,41.4 82.1,36.7 90.8,36.7 93.4,34.1 P25.5@93.4,32.4
  Top Layer w0.65: VT6.3@74.3,47 77.4,47 ; C16.1@77.4,42.4 C14.1@77.4,44.9 77.4,47 ; VT10.3@78.9,47 77.4,47
OUT_Y-: C13.2 C15.2 P25.6 R67.1 R69.1 | length 29.2
  Top Layer w0.5: R67.1@90.4,42.4 90.4,40.1 98.1,32.4 P25.6@98.4,32.4
  Top Layer w0.65: C15.2@83.8,42.4 R67.1@90.4,42.4 ; C13.2@83.8,44.9 R69.1@90.4,44.9
  Top Layer w1: C15.2@83.8,42.4 C13.2@83.8,44.9
OUT_Z: P25.3 R161.1 | length 36.6
  Top Layer w0.5: R161.1@53,43.4 53,40.6 55.7,37.9 71.8,37.9 74,35.7 80.1,35.7 P25.3@83.4,32.4
RX_3: D3.48 P11.3 | length 16.2
  Top Layer w0.25: D3.48@104.06,67.713 104.06,65.886 105.946,64 113.42,64 P11.3@116.42,67
SPI2_MISO: D3.53 P2.5 | length 28.1
  Top Layer w0.25: D3.53@106.785,70.438 129.635,70.438 131.953,68.12 P2.5@133.9,68.12
SPI2_MOSI: D3.54 P2.6 | length 30.8
  Top Layer w0.25: D3.54@106.785,70.938 129.771,70.938 131.309,69.4 135.16,69.4 P2.6@136.44,68.12
SPI2_NSS: D3.51 P2.7 | length 28.7
  Top Layer w0.25: D3.51@106.785,69.438 129.362,69.438 133.22,65.58 P2.7@133.9,65.58
SPI2_SCK: D3.52 P2.8 | length 31.5
  Top Layer w0.25: D3.52@106.785,69.938 129.498,69.938 132.536,66.9 135.12,66.9 P2.8@136.44,65.58
SPI3_CS1: D3.79 D23.12 | length 58.5
  Top Layer w0.25: D3.79@103.56,83.163 103.56,93.96 106.5,96.9 127.1,96.9 127.95,97.75 144.65,97.75 v1@145,97.4
  Bottom Layer w0.5: v1(145.2,97.2) 148.6,97.2 v1(149.4,98)
SPI3_CS2: D3.81 D24.12 | length 54.5
  Top Layer w0.25: D3.81@102.56,83.163 102.61,83.213 102.61,94.41 106.9,98.7 139.4,98.7 140.42,99.72 D24.12@140.42,102.9
SPI3_CS3: D3.92 D30.12 | length 50.5
  Top Layer w0.25: D3.92@97.06,83.163 97.06,94.376 93.45,97.986 93.45,99.15 121.85,99.15 124.02,101.32 D30.12@124.02,102.9
SPI3_CS4: D3.93 D31.12 | length 35.9
  Top Layer w0.25: D3.93@96.56,83.163 96.56,94.24 93,97.8 93,99.6 107.1,99.6 108.52,101.02 D31.12@108.52,102.9
SPI3_MOSI: D3.80 D23.14 D24.14 D30.14 D31.14 R11.1 | length 82.2
  Top Layer w0.25: D3.80@103.06,83.163 103.06,94.16 107.1,98.2 141.2,98.2 ; v1(130,93.2) 131.48,93.2 R11.1@131.7,93.42 ; D24.14@142.96,102.9 142.96,99.96 141.2,98.2 ; D23.14@150.6,95.44 148.36,95.44 145.6,98.2 141.2,98.2
  Bottom Layer w0.5: v1(111.1,97.8) v1(111.1,101.6) ; v1(126.6,101.6) v1(126.6,97.8) 126.6,96.6 v1(130,93.2)
SPI3_SCK: D3.78 D20.4 D23.11 D24.11 D30.11 D31.11 | length 97.3
  Top Layer w0.25: D3.78@104.06,83.163 104.06,93.76 106.75,96.45 127.286,96.45 128.136,97.3 141.5,97.3 141.9,96.9 v1(141.9,96.5) 142.3,96.5 145.1,93.7 145.1,91.5 147.6,89 148.7,89 149.5,88.2 152.2,88.2 152.4,88 152.4,84.3 151.61,83.51 D20.4@150.35,83.51
  Bottom Layer w0.5: v1(107.2,101.7) 107.2,96.1 v1(107.3,96) ; v1(122.7,96) v1(122.7,101.7) ; v1(139.1,101.7) 141.9,98.9 ; v1(141.9,96.5) 141.9,98.9 ; v1(149.4,99.3) 142.3,99.3 141.9,98.9
SWCLK: D3.76 P1.2 | length 15.3
  Top Layer w0.25: D3.76@105.06,83.163 105.06,85.96 109.16,90.06 P1.2@115.9,90.06
SWDIO: D3.72 P1.4 | length 12.4
  Top Layer w0.25: D3.72@106.785,79.938 112.838,79.938 114.3,81.4 114.3,83.38 P1.4@115.9,84.98
T1_BKIN: C24.1 D3.46 D13.4 R77.1 | length 23.3
  Top Layer w0.25: D3.46@103.06,67.713 103.06,65.613 105.573,63.1 115.475,63.1 R77.1@116.975,61.6
  Top Layer w0.5: R77.1@116.975,61.6 119.425,61.6 C24.1@119.475,61.65 ; C24.1@119.525,61.6 D13.4@122.675,61.6
T8_1: D3.63 D19.3 | length 47.7
  Top Layer w0.25: D3.63@106.785,75.438 130.856,75.438 132.268,76.85 137.796,76.85 146.386,68.26 D19.3@150.35,68.26
T8_2: D3.64 D19.2 | length 47.3
  Top Layer w0.25: D3.64@106.785,75.938 130.72,75.938 132.082,77.3 137.982,77.3 145.752,69.53 D19.2@150.35,69.53
T9_1: D3.25 R60.1 R64.1 | length 38
  Top Layer w0.25: R64.1@79.9,53.5 84.7,53.5 86.9,55.7 ; v1(89.3,61.2) 89.725,61.625 89.725,68.725 90.438,69.438 D3.25@91.335,69.438 ; R60.1@92.4,56 92.4,55.6 93.4,54.6 93.4,52.1 90.5,52.1 86.9,55.7 ; 86.9,55.7 v1(86.9,57.4) 86.9,55.7
  Bottom Layer w0.5: v1(86.9,57.4) 89.3,59.8 v1(89.3,61.2)
T9_2: D3.26 R59.1 R62.2 | length 41.6
  Top Layer w0.25: R59.1@73.3,56.1 72.5,56.1 72.3,56.3 72.3,58.85 72.7,59.25 86.55,59.25 v1(88.4,57.4) 88.4,55.2 90.2,53.4 R62.2@92.4,53.4 ; v1(90.7,61.2) 90.175,61.725 90.175,65.775 92.375,65.775 93.06,66.46 D3.26@93.06,67.713
  Bottom Layer w0.5: v1(88.4,57.4) 90.7,59.7 v1(90.7,61.2)
T10_1: D3.95 R21.2 | length 41.3
  Top Layer w0.25: R21.2@88.52,119.6 88.52,118.42 86.228,116.128 86.228,103.872 95.56,94.54 D3.95@95.56,83.163
T11_1: D3.96 R27.2 | length 41.1
  Top Layer w0.25: R27.2@83.92,119.6 83.92,117.98 85.778,116.122 85.778,103.685 95.06,94.404 D3.96@95.06,83.163
T_1: D14.3 P6.1 VD1.1 | length 14.4
  Top Layer w0.5: P6.1@130.62,138.1 131.72,137 131.72,129.6 132.92,128.4 132.92,126.8 132.38,126.26 D14.3@132.38,124.9
T_2: D17.3 P6.2 VD2.1 | length 15.1
  Top Layer w0.5: D17.3@125.78,124.9 125.78,126.26 126.32,126.8 VD2.1@126.32,127.5 126.32,128.4 125.12,129.6 125.12,131.6 128.08,134.56 P6.2@128.08,138.1
T_3: D21.3 P6.3 VD3.1 | length 17.6
  Top Layer w0.5: D21.3@119.18,124.9 119.18,126.26 119.72,126.8 VD3.1@119.72,127.5 119.72,128.4 118.52,129.6 118.52,131.6 123.22,136.3 124.52,136.3 125.54,137.32 P6.3@125.54,138.1
TX_3: D3.47 P11.2 | length 19.7
  Top Layer w0.25: D3.47@103.56,67.713 103.56,65.75 105.76,63.55 115.51,63.55 P11.2@118.96,67
VCC: C48.1 C49.1 C50.1 C51.1 C52.1 C58.1 C59.1 D3.11 D3.19 D3.28 D3.50 D3.75 D3.100 D38.2 L1.1 P1.1 P11.1 R3.1 VL1.1 | length 174
  Top Layer w0.25: v1@77.6,72.3 77.738,72.438 D3.19@91.335,72.438 ; C48.1@86.15,77.6 86.25,77.5 v1(87.9,77.5) 88.962,76.438 D3.11@91.335,76.438 ; C48.1@86.15,77.8 C48.1@86.25,77.7 ; C52.1@88.65,84.9 88.85,85.1 v1(90.4,85.1) 92.2,85.1 93.06,84.24 D3.100@93.06,83.163 ; C49.1@91.3,64.85 93.55,64.85 v1(93.6,64.9) 94.06,65.36 D3.28@94.06,67.713 ; D3.75@106.785,81.438 108.638,81.438 109.25,82.05 C51.1@109.25,84.1 109.3,84.15 v1(109.3,86)
  Top Layer w0.35: C58.1@83.1,71.5 84.6,70 86.7,70 VL1.1@87,69.7
  Top Layer w0.5: D38.2@76.9,69.8 76.9,71.6 v1(77.3,72) 77.6,72.3 83.1,72.3 C58.1@83.1,71.5 ; 105.2,67.4 v1(107.2,67.4) 108.45,67.4 C50.1@108.95,67.9 ; C59.1@111.7,92 112.9,92 v1(113.5,92.6)
  Bottom Layer w0.35: v1(107.2,67.4) 109,69.2 121.5,69.2 ; P1.1@115.9,92.6 117.7,92.6 121.5,88.8 121.5,69.2 ; P11.1@121.5,67 121.5,69.2
  Bottom Layer w0.5: v1(77.3,72) L1.1@79,72 ; v1(87.9,77.5) 87.9,78.4 87.3,79 R3.1@86,79 ; v1(93.6,64.9) 90.6,67.9 79.8,67.9 79,68.7 L1.1@79,70.5 L1.1@79,72 ; P1.1@115.9,92.6 113.7,92.6 109.3,88.2 v1(109.3,86) 91.4,86 86,80.6 R3.1@86,79 ; L1.1@79,72 79,72.6 81.9,75.5 81.9,76.3 84.6,79 R3.1@86,79
X_A: C25.1 D3.77 D22.5 R82.1 | length 43.4
  Top Layer w0.25: v1@97.6,103.1 99.327,103.1 100.1,103.873 R82.1@100.1,114.7 100.43,115.03 D22.5@100.43,117.25 ; D3.77@104.56,83.163 104.56,92.96 v1(105.1,93.5)
  Bottom Layer w0.25: v1(97.6,103) 102.4,103 106.4,99 106.4,94.8 v1(105.1,93.5)
X_A+: P8.1 R30.1 | length 16.4
  Top Layer w0.5: P8.1@98.1,138.14 99.46,138.14 100.8,136.8 100.8,132.5 103.5,129.8 103.5,126.1 103.1,125.7 R30.1@102.3,125.7
X_A-: D22.3 P8.3 VD4.1 | length 20
  Top Layer w0.35: P8.3@95.56,138.14 96.875,136.825 99.375,136.825 99.5,136.7
  Top Layer w0.5: D22.3@99.16,123 99.16,125.16 VD4.1@99.6,125.6 99.2,125.6 98.2,126.6 98.2,133.1 99.8,134.7 99.8,136.4 99.5,136.7
X_B: C26.1 D3.89 D25.5 R83.1 | length 39.8
  Top Layer w0.25: v1(93.9,100.8) R83.1@93.9,114.7 94.13,114.93 D25.5@94.13,117.25 ; v1(96.8,98.3) 96.8,96.546 98.56,94.786 D3.89@98.56,83.163
  Bottom Layer w0.25: v1(93.9,100.8) 93.4,100.3 93.4,97.9 93.9,97.4 96.4,97.4 96.8,97.8 v1(96.8,98.3)
X_B+: P8.2 R33.1 | length 11.1
  Top Layer w0.5: R33.1@96.1,125.7 96.8,125.7 97.3,126.2 97.3,134.8 P8.2@98.1,135.6
X_B-: D25.3 P8.4 VD5.1 | length 14.7
  Top Layer w0.5: D25.3@92.86,123 92.86,125.06 VD5.1@93.4,125.6 92.2,126.8 92.2,129.7 95.56,133.06 P8.4@95.56,135.6
Y1: D35.16 P4.1 | length 22.8
  Top Layer w0.25: D35.16@145.275,58.7 146.1,58.7 156.35,48.45 156.35,46.25 158.4,44.2 P4.1@160.76,44.2
Y1_1: C5.1 D3.12 Y1.2 | length 20.3
  Top Layer w0.25: C5.1@72.3,76.25 72.75,75.8 Y1.2@74.5,75.8 77.2,75.8 78.6,77.2 82.6,77.2 83.2,76.6 87.4,76.6 88.062,75.938 D3.12@91.335,75.938
Y1_2: C6.1 D3.13 Y1.1 | length 12.3
  Top Layer w0.25: Y1.1@79.5,75.8 80.8,75.8 81.125,76.125 86.675,76.125 87.362,75.438 D3.13@91.335,75.438
Y2: D35.15 P4.2 | length 26.1
  Top Layer w0.25: D35.15@145.275,57.43 146.288,57.43 155.9,47.818 155.9,45.3 158.3,42.9 162,42.9 P4.2@163.3,44.2
Y3: D35.14 P4.3 | length 23.6
  Top Layer w0.25: D35.14@145.275,56.16 146.922,56.16 155.45,47.632 155.45,44.05 157.84,41.66 P4.3@160.76,41.66
Y4: D35.13 P4.4 | length 27.4
  Top Layer w0.25: D35.13@145.275,54.89 147.556,54.89 155,47.446 155,42.5 157.1,40.4 162.04,40.4 P4.4@163.3,41.66
Y5: D35.12 P4.5 | length 24.4
  Top Layer w0.25: D35.12@145.275,53.62 148.189,53.62 154.55,47.259 154.55,42.259 157.689,39.12 P4.5@160.76,39.12
Y6: D35.11 P4.6 | length 27.5
  Top Layer w0.25: D35.11@145.275,52.35 148.823,52.35 154.1,47.073 154.1,42.073 158.373,37.8 161.98,37.8 P4.6@163.3,39.12
Y7: D35.10 P4.7 | length 24.4
  Top Layer w0.25: D35.10@145.275,51.08 149.456,51.08 153.65,46.886 153.65,41.886 158.956,36.58 P4.7@160.76,36.58
Y8: D20.16 P12.1 | length 5.3
  Top Layer w0.35: D20.16@156,87.32 160.46,87.32 P12.1@161.06,86.72
Y9: D20.15 P12.2 | length 8.3
  Top Layer w0.35: D20.15@156,86.05 159.07,86.05 159.625,85.495 162.375,85.495 P12.2@163.6,86.72
Y10: D20.14 P12.3 | length 5.3
  Top Layer w0.35: D20.14@156,84.78 158.74,84.78 159.34,84.18 P12.3@161.06,84.18
Y11: D20.13 P12.4 | length 8.4
  Top Layer w0.35: D20.13@156,83.51 158.81,83.51 159.4,82.92 162.34,82.92 P12.4@163.6,84.18
Y12: D20.12 P12.5 | length 5.3
  Top Layer w0.35: D20.12@156,82.24 158.68,82.24 159.28,81.64 P12.5@161.06,81.64
Y13: D20.11 P12.6 | length 8.3
  Top Layer w0.35: D20.11@156,80.97 158.65,80.97 159.205,80.415 162.375,80.415 P12.6@163.6,81.64
Y14: D20.10 P12.7 | length 5.3
  Top Layer w0.35: D20.10@156,79.7 158.22,79.7 158.82,79.1 P12.7@161.06,79.1
Y_15: D19.16 P17.1 | length 5
  Top Layer w0.35: D19.16@156,70.8 160.16,70.8 P17.1@160.76,70.2
Y_16: D19.15 P17.2 | length 8.1
  Top Layer w0.35: D19.15@156,69.53 158.37,69.53 159,68.9 162,68.9 P17.2@163.3,70.2
Y_17: D19.14 P17.3 | length 5
  Top Layer w0.35: D19.14@156,68.26 158.54,68.26 159.14,67.66 P17.3@160.76,67.66
Y_18: D19.13 P17.4 | length 8.1
  Top Layer w0.35: D19.13@156,66.99 158.41,66.99 159,66.4 162.04,66.4 P17.4@163.3,67.66
Y_19: D19.12 P17.5 | length 5
  Top Layer w0.35: D19.12@156,65.72 158.58,65.72 159.18,65.12 P17.5@160.76,65.12
Y_20: D19.11 P17.6 | length 8.1
  Top Layer w0.35: D19.11@156,64.45 158.65,64.45 159.295,63.805 161.985,63.805 P17.6@163.3,65.12
Y_21: D19.10 P17.7 | length 5
  Top Layer w0.35: D19.10@156,63.18 158.32,63.18 158.92,62.58 P17.7@160.76,62.58
Y_A: C27.1 D3.90 D32.5 R84.1 | length 54.6
  Top Layer w0.25: v1(95.6,98.3) 95.6,97.109 98.06,94.649 D3.90@98.06,83.163 ; v1(99,100.8) 99,101.5 101.55,104.05 101.55,110.559 102.941,111.95 106.85,111.95 109.125,114.225 111.825,114.225 R84.1@112.4,114.8 112.4,115.3 113.07,115.97 D32.5@113.07,117.31
  Bottom Layer w0.25: v1(95.6,98.3) 95.6,98.464 96.836,99.7 97.9,99.7 v1(99,100.8)
  Bottom Layer w0.5: C27.1@94.85,105.2 96,105.2 96.3,104.9 96.3,102.6 97,101.9 98.6,101.9 99,101.5 v1(99,100.8)
Y_A+: P9.1 R36.1 | length 16.5
  Top Layer w0.5: P9.1@109.64,138.1 110.8,138.1 112.54,136.36 112.54,132.96 116.14,129.36 116.14,126.56 115.34,125.76 R36.1@114.84,125.76
Y_A-: D32.3 P9.3 VD6.1 | length 18.8
  Top Layer w0.35: P9.3@107.1,138.1 108.34,136.86 110.84,136.86
  Top Layer w0.5: 110.84,136.86 111.34,136.36 111.34,133.96 110.74,133.36 110.74,126.96 VD6.1@112.04,125.66 ; D32.3@111.8,123.06 VD6.1@111.8,125.42
Y_B: C28.1 D3.91 D33.5 R85.1 | length 46.4
  Top Layer w0.25: v1(94.4,98.3) 94.4,97.673 97.56,94.513 D3.91@97.56,83.163 ; v1(97.3,100.8) 97.664,100.8 101.1,104.236 101.1,110.746 102.754,112.4 104.8,112.4 105.4,113 R85.1@105.4,114.7 105.4,114.8 106.77,116.17 D33.5@106.77,117.31
  Bottom Layer w0.25: v1(94.4,98.3) 94.4,99 95.2,99.8 96.3,99.8 v1(97.3,100.8)
  Bottom Layer w0.5: C28.1@94.85,102.7 94.85,101.75 95.8,100.8 v1(97.3,100.8)
Y_B+: P9.2 R37.1 | length 10.9
  Top Layer w0.5: R37.1@108.64,125.76 109.34,125.76 109.94,126.36 109.94,135.26 P9.2@109.64,135.56
Y_B-: D33.3 P9.4 VD7.1 | length 14.5
  Top Layer w0.5: D33.3@105.5,123.06 105.5,125.22 VD7.1@105.94,125.66 105.44,125.66 104.64,126.46 104.64,130.86 107.1,133.32 P9.4@107.1,135.56
Z_A: C29.1 D3.23 D36.5 R86.1 | length 44
  Top Layer w0.25: D36.5@63.15,67.03 67.7,67.03 ; R86.1@67.7,68.3 67.7,67.55 ; C29.1@70.3,67.55 67.7,67.55 ; D3.23@91.335,70.438 89.738,70.438 88.825,69.525 88.825,62.525 88.775,62.475 88.772,62.475 88.025,61.728 88.025,61.725 87.35,61.05 71.15,61.05 69.2,63 69.2,64.6 67.7,66.1 67.7,67.03 ; 67.7,67.03 67.7,67.55
Z_A+: P10.1 R44.1 | length 5.8
  Top Layer w0.5: P10.1@28.86,51 28.86,53.96 R44.1@30.9,56
Z_A-: D36.3 P10.3 VD11.1 | length 38.5
  Top Layer w0.25: VD11.1@33.4,55.8 33.4,56.4 35.1,58.1 39.9,58.1 43.55,61.75 53.39,61.75 56.075,64.435 56.075,65.76 D36.3@57.4,65.76
  Top Layer w0.35: P10.3@28.86,48.46 30.1,49.7 30.1,52.2 33.4,55.5 VD11.1@33.4,55.8
Z_B: C30.1 D3.24 D37.5 R87.1 | length 40
  Top Layer w0.25: D37.5@63.15,62.73 67.65,62.73 ; C30.1@67.65,61.3 67.65,62.73 ; R87.1@67.7,63.26 R87.1@67.7,63.8 67.65,63.75 67.65,62.73 ; D3.24@91.335,69.938 90.038,69.938 89.275,69.175 89.275,62.339 88.961,62.025 88.958,62.025 88.475,61.542 88.475,61.538 87.536,60.6 70.6,60.6 68.47,62.73 67.65,62.73
Z_B+: P10.2 R51.1 | length 8
  Top Layer w0.35: P10.2@31.4,51 31.4,52 33.4,54 34.5,54 35.9,55.4 R51.1@35.9,56.5
Z_B-: D37.3 P10.4 VD15.1 | length 32.6
  Top Layer w0.25: P10.4@31.4,48.46 34.26,48.46 VD15.1@34.3,48.5 35.8,50 35.8,52 44.65,60.85 54.45,60.85 55.06,61.46 D37.3@57.4,61.46
pads on no net: D3.6 D18.11 D23.9 D24.9 D26.6 D27.6 D28.6 D29.6 D30.9 D31.9 D34.9

## Polygon pours and split planes (outlines as drawn)
GND on Top Layer "GND_POLY" (solid, pour order 6): 33.5,134.2 158,134.2 158,37.536 148.964,28.5 146.5,28.5 103,28.5 103,33.4 33.5,33.4
GND on Top Layer "GND_POLY" (solid, pour order 0): 53.3,30.9 37.8,30.9 37.8,38.2 37.5,38.5 37.4,38.4 32,38.4 32,47 34.2,49.2 34.2,55.3 39.5,60.6 60.8,60.6 62.6,58.8 66.8,54.6 66.8,48.9 66.8,45.6 66.6,45.4 57.3,45.4 53.3,45.4
GND on Bottom Layer "GND_POLY" (solid, pour order 4): 33.5,54.2 33.5,134.2 44.7,134.2 158,134.2 158,125.4 158,103 158,70.9 158,37.5 146.5,28.5 103,28.5 103,33.5 33.4,33.5 33.4,33.4
GND on Bottom Layer "GND_POLY" (solid, pour order 2): 37.8,29.4 37.8,38.4 32,38.4 32,44 32,47 32.7,47.7 33.5,48.5 33.5,54.2 39,59.7 50.2,59.7 61.7,59.7 66.8,54.6 66.8,44.4 55.7,33.3 55.7,29.5

## Silkscreen, mask and mechanical layers (free items; w line width, h text height)
Mechanical 1:
  lines w0.25: 27,28 38.5,28 165.5,28 165.5,140 27,140 27,28
  lines w0.254: 27.024,140.738 27.024,141.246 ; 28.548,140.484 27.024,140.992 ; 28.548,141.5 27.024,140.992 ; 89.139,140.992 27.024,140.992 ; 103.409,140.992 165.524,140.992 ; 164,140.484 165.524,140.992 ; 164,141.5 165.524,140.992 ; 165.524,140.738 165.524,141.246 ; 166.5,29.5 167.008,27.976 ; 166.5,138.452 167.008,139.976 ; 166.754,27.976 167.262,27.976 ; 166.754,139.976 167.262,139.976 ; 167.008,78.364 167.008,27.976 ; 167.008,89.588 167.008,139.976 ; 167.516,29.5 167.008,27.976 ; 167.516,138.452 167.008,139.976
  text "138.5 (mm)" at 89.393,140.078 h1.52
  text "112 (mm)" at 167.922,78.618 h1.52 r90